# Altium PCB HMC2003_module_SET_RESET.PcbDoc
Units mm, origin at the board's own origin, x right, y up, seen from the top; angles counter-clockwise.
Board outline 56.22 x 22 mm, 2 copper layers (Top Layer, Bottom Layer); 64 components, 30 nets, 154 pads, 77 vias.
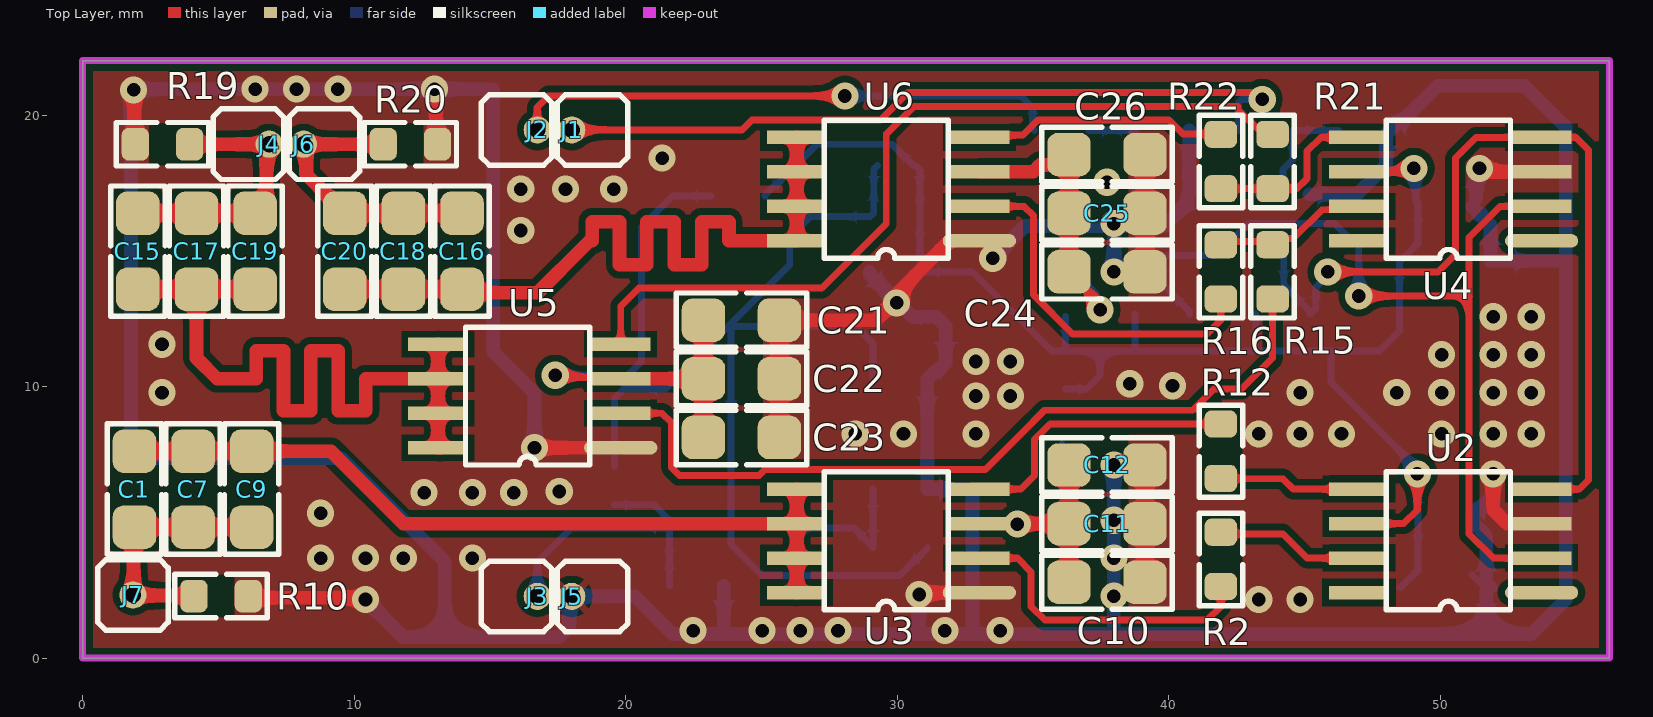
[diagram p0: Top Layer view]
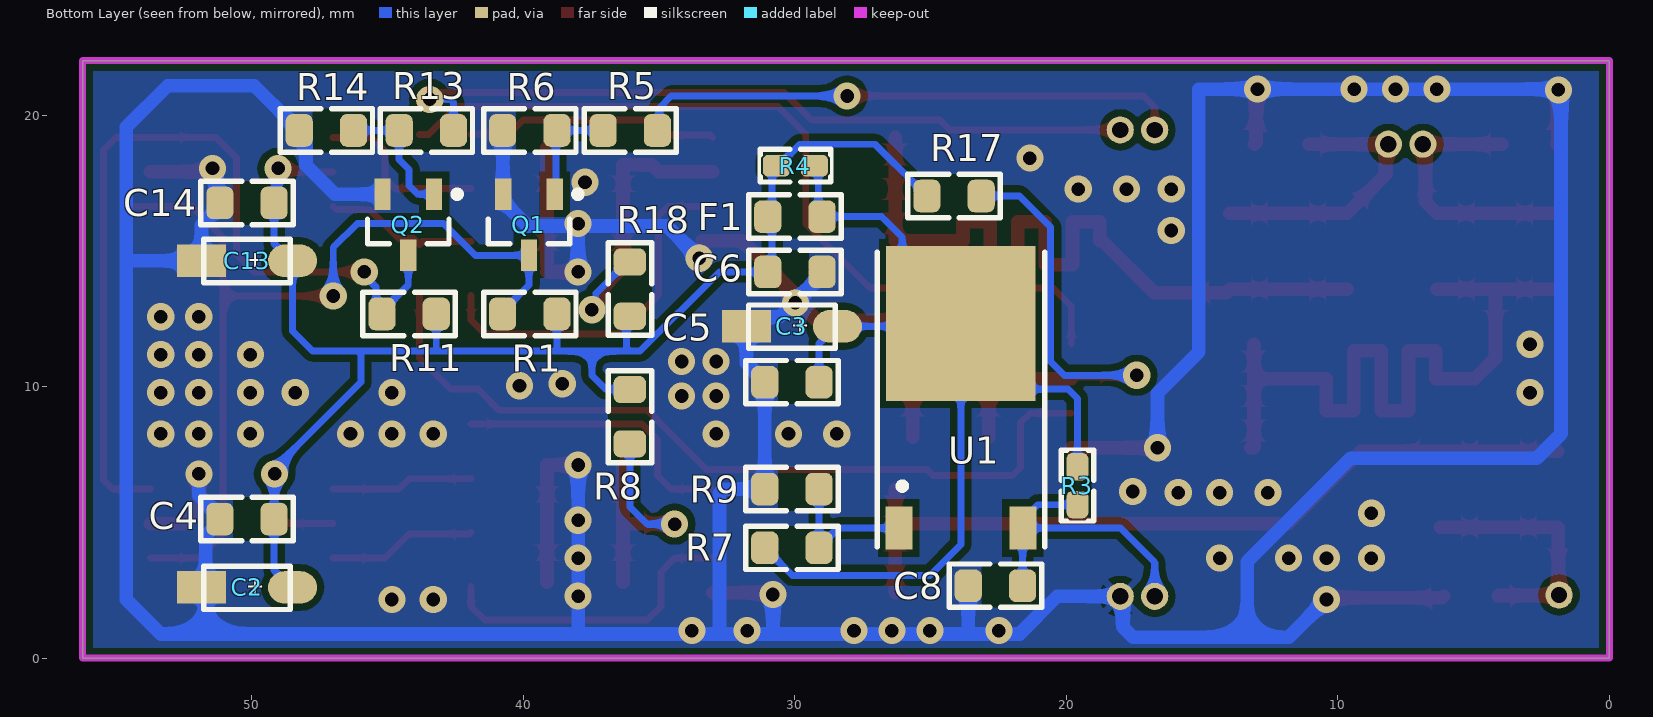
[diagram p1: Bottom Layer view, seen from below]
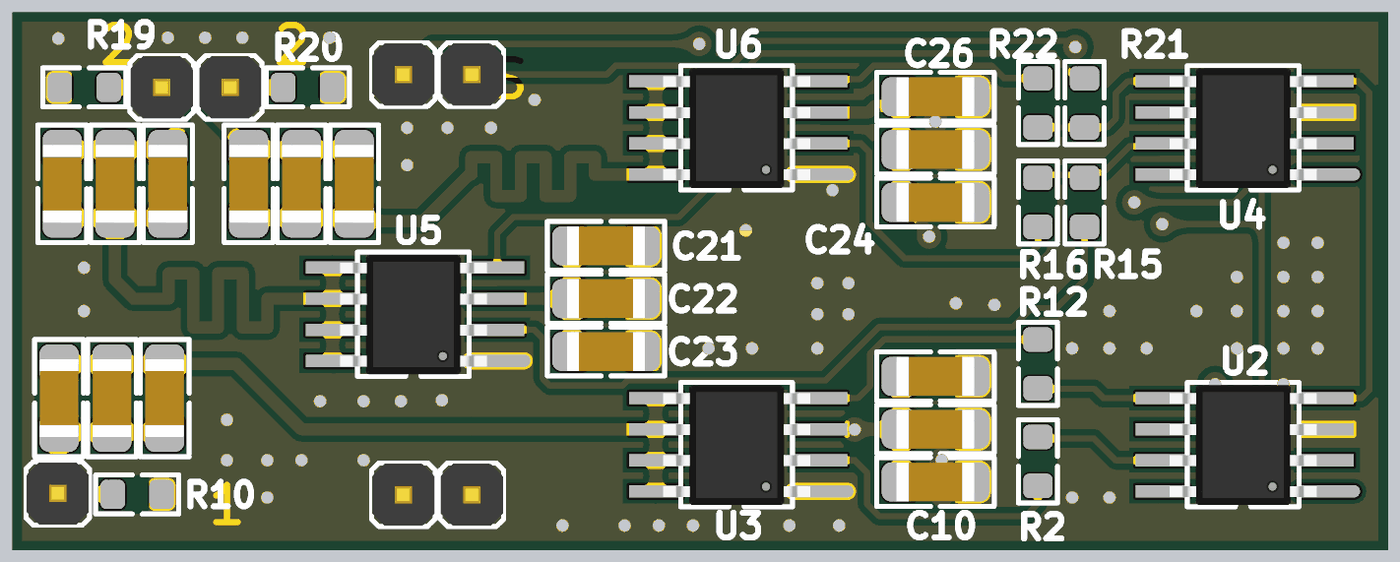
[diagram p2: 3D render of the assembled board from above, using the file's embedded part models]

## Layer stack, top to bottom
Top Solder: solder mask 0.0102, Solder Resist, Dk 3.5
Top Layer: signal copper 0.0356
Dielectric1: dielectric 0.32, FR-4, Dk 4.8
Bottom Layer: signal copper 0.0356
Bottom Solder: solder mask 0.0102, Solder Resist, Dk 3.5

## Board outline
0,0 0,22 56.216,22 56.216,0

## Design rules (kind name [scope] priority, off if disabled: settings)
Clearance [All] p1: gap=0.254 ignorepadtopadclearanceinfootprint=FALSE except(0: Arc-Hole Track-Hole SMDPad-Hole THPad-Hole Via-Hole Fill-Hole Poly-Hole Region-Hole Text-Hole)
PolygonConnect [All] p1: thpad.connectstyle=Relief thpad.reliefconductorwidth=0.254 thpad.reliefentries=4 thpad.polygonreliefangle="45 Angle" thpad.airgapwidth=0.254 smdpad.connectstyle=Direct smdpad.reliefconductorwidth=0.254 smdpad.reliefentries=4 smdpad.polygonreliefangle="90 Angle" smdpad.airgapwidth=0.254 via.connectstyle=Direct via.reliefconductorwidth=0.254 via.reliefentries=4 via.polygonreliefangle="90 Angle" via.airgapwidth=0.254
RoutingVias [All] p1: holewidth=0.5 width=1 viastyle="Through Hole" minholewidth=0.5 minwidth=1 maxholewidth=0.5 maxwidth=1
SilkToSolderMaskClearance SilkscreenOverComponentPads [IsPad] p1: minsilkscreentomaskgap=0.254 clearancetoexposedcopper=TRUE
SolderMaskExpansion [All] p1: expansion=0.102 istentingtop=FALSE
Width [All] p1: maxlimit=0.5 minlimit=0.254 preferedwidth=0.254
29 further rules are at their usual default settings.

## Components (designator, comment, footprint, x,y, rotation, side; value= is the part's Value field where it differs from the comment)
C1 "47nF" C1206 1.905,6.223 r270 top
C2 "4.7uf" cap_smd_a 50.165,2.578 r0 bottom
C3 "4.7uf" cap_smd_a 30.099,12.192 r0 bottom
C4 "100nF" C0805 50.165,5.118 r0 bottom
C5 "100nf" C0805 30.099,10.16 r180 bottom
C6 "100nf" C0805 29.988,14.224 r0 bottom
C7 "47nF" C1206 4.064,6.223 r270 top
C8 "100nf" C0805 22.606,2.667 r180 bottom
C9 "47nF" C1206 6.223,6.223 r270 top
C10 "100nF" C1206 37.719,2.794 r0 top
C11 "100nF" C1206 37.719,4.953 r0 top
C12 "100nF" C1206 37.719,7.112 r0 top
C13 "4.7uf" cap_smd_a 50.165,14.605 r0 bottom
C14 "100nF" C0805 50.165,16.764 r0 bottom
C15 "47nF" C1206 2.032,14.986 r90 top
C16 "47nF" C1206 13.97,14.986 r90 top
C17 "47nF" C1206 4.191,14.986 r90 top
C18 "47nF" C1206 11.811,14.986 r90 top
C19 "47nF" C1206 6.35,14.986 r90 top
C20 "47nF" C1206 9.652,14.986 r90 top
C21 "100nF" C1206 24.257,12.446 r0 top
C22 "100nF" C1206 24.257,10.287 r0 top
C23 "100nF" C1206 24.257,8.128 r0 top
C24 "100nF" C1206 37.719,14.224 r0 top
C25 "100nF" C1206 37.719,16.383 r0 top
C26 "100nF" C1206 37.719,18.542 r0 top
F1 "Ferrite bead" 0805#1 29.988,16.256 r0 bottom value=10mH
J1 "HDRM1" HDR_M_1#1 18.775,19.45 r0 top
J2 "HDRM1" HDR_M_1#2 15.975,19.45 r0 top
J3 "HDRM1" HDR_M_1#2 15.975,2.275 r0 top
J4 "HDRM1" HDR_M_1#2 6.1,18.925 r0 top
J5 "HDRM1" HDR_M_1#1 18.775,2.275 r0 top
J6 "HDRM1" HDR_M_1#1 8.9,18.925 r0 top
J7 "HDRM1" HDR_M_1#3 1.85,2.325 r90 top
Q1 "bc817" sot-23 39.751,16.002 r0 bottom
Q2 "bc817" sot-23 44.196,16.002 r0 bottom
R1 "18K" 0805#1 39.751,12.673 r180 bottom
R2 "100" 0805#1 41.91,3.636 r90 top
R3 "0" 0603 19.558,6.35 r270 bottom
R4 "0" 0603 29.972,18.161 r180 bottom
R5 "1K" 0805#1 36.052,19.431 r0 bottom
R6 "10K" 0805#1 39.751,19.431 r180 bottom
R7 "1.2K" 0805#1 30.099,4.064 r0 bottom
R8 "100" 0805#1 36.068,8.89 r270 bottom
R9 "6.2K" 0805#1 30.099,6.223 r180 bottom
R10 "1.5" 0805#1 5.096,2.286 r0 top
R11 "18K" 0805#2 44.196,12.673 r180 bottom
R12 "100" 0805#1 41.91,7.62 r270 top
R13 "1K" 0805#1 43.561,19.431 r0 bottom
R14 "10K" 0805#1 47.244,19.431 r180 bottom
R15 "100" 0805#1 43.815,14.224 r90 top
R16 "100" 0805#1 41.91,14.224 r90 top
R17 "100" 0805#1 24.13,17.018 r180 bottom
R18 "100" 0805#1 36.068,13.589 r90 bottom
R19 "1.5" 0805#1 2.937,18.923 r180 top
R20 "1.5" 0805#1 12.065,18.923 r0 top
R21 "100" 0805#1 43.815,18.288 r270 top
R22 "100" 0805#1 41.91,18.288 r270 top
U1 "LM1117T-ADJ" DPAK 23.622,8.111 r90 bottom
U2 "TC4428" sop8 50.292,4.191 r180 top
U3 "IRF7105" sop8 29.591,4.191 r180 top
U4 "TC4428" sop8 50.292,17.145 r180 top
U5 "IRF7105" sop8 16.383,9.525 r180 top
U6 "IRF7105" sop8 29.591,17.145 r180 top

## Footprints (in the part's own frame and the unit in brackets; to place one, negate y for a bottom-side part, rotate by r counter-clockwise, add the part's x,y. Pads: shape width x height; smd on the part's side, far side on the other; paste and mask are expansions set on the pad)
0603 [mm]
  rrect50% 1x0.8 smd mask+0.075: 1(-0.7,-0.027) 2(0.7,-0.027)
  silkscreen extent -1.34,-0.63 1.34,0.57, body extent -0.87,-0.5 0.87,0.45, height 0.6
0805#1 [mm] ",0805, 2012, 200X130"
  rrect50% 1x1.2 smd mask+0.075: 1(-1,0) 2(1,0)
  Top Layer pour cut-out: -0.5,0.8 0.5,0.8 0.5,-0.8 -0.5,-0.8
  silkscreen extent -1.7,-0.8 1.7,0.8, body extent -1,-0.65 1,0.65, height 0.8
0805#2 [mm] ",0805, 2012, 200X130"
  rrect50% 1x1.2 smd: 1(-1,0) 2(1,0)
  Top Layer pour cut-out: -0.5,0.8 0.5,0.8 0.5,-0.8 -0.5,-0.8
  silkscreen extent -1.7,-0.8 1.7,0.8, body extent -1,-0.65 1,0.65, height 0.8
C0805 [mm] "CHIP Capacitor, 2.0X1.3mm, 0805"
  rrect50% 1x1.2 smd mask+0.075: 1(-1,0) 2(1,0)
  Top Layer pour cut-out: -0.5,0.8 0.5,0.8 0.5,-0.8 -0.5,-0.8
  silkscreen extent -1.7,-0.8 1.7,0.8, body extent -1,-0.63 1,0.62, height 1
C1206 [mm] "CHIP Capacitor, 3.2X1.6mm, 1206"
  rrect50% 1.6x1.6 smd mask+0.075: 1(-1.4,0) 2(1.4,0)
  Top Layer pour cut-out: -0.8,1 -0.8,-1 0.8,-1 0.8,1
  silkscreen extent -2.4,-1 2.4,1, body extent -1.6,-0.8 1.6,0.8, height 1
cap_smd_a [mm]
  oval 1.8x1.2 smd: 1(-1.676,-0.025)
  rect 1.8x1.2 smd: 2(1.676,-0.025)
  silkscreen extent -1.6,-0.81 1.6,0.79, body extent -1.7,-0.89 1.7,0.91, height 1.7
DPAK [mm]
  rect 1.6x1 smd: 1(-3.319,2.539) 3(-3.319,-2.031)
  rect 5.7x5.5 smd: 2(4.208,0.254)
  silkscreen extent -4.02,-2.83 6.83,3.34, body extent -3.7,-3.05 6.24,3.49, height 2.44
HDR_M_1#1 [mm] "Connector; Header; 1 Position"
  round 1 hole 0.6 mask+0.1: 1(-0.765,0)
  silkscreen extent -1.3,-1.3 1.3,1.3, body extent -1.27,-1.27 1.27,1.27, height 8.54
HDR_M_1#2 [mm] "Connector; Header; 1 Position"
  round 1 hole 0.6 mask+0.1: 1(0.765,0)
  silkscreen extent -1.3,-1.3 1.3,1.3, body extent -1.27,-1.27 1.27,1.27, height 8.54
HDR_M_1#3 [mm] "Connector; Header; 1 Position"
  round 1 hole 0.6 mask+0.1: 1(0,0)
  silkscreen extent -1.3,-1.3 1.3,1.3, body extent -1.27,-1.27 1.27,1.27, height 8.54
sop8 [mm]
  oval 2.7x0.5 smd: 1(-3.429,1.778)
  rect 2.2x0.5 smd: 2(-3.429,0.508) 3(-3.429,-0.762) 4(-3.429,-2.032) 5(3.298,-2.032) 6(3.298,-0.762) 7(3.298,0.508) 8(3.298,1.778)
  silkscreen extent -2.29,-2.67 2.29,2.41, body extent -3.01,-2.56 2.99,2.34, height 1.7
sot-23 [mm]
  rect 0.6x1.15 smd: 1(-0.919,-1.081) 2(0.981,-1.081) 3(0.031,1.169)
  silkscreen extent -1.89,-1.21 1.53,0.74, body extent -1.42,-1.18 1.48,1.12, height 1

## Part data
C1 C4 C5 C6 C7 C8 C9 C10 C11 C12 C14 C15 C16 C17 C18 C19 C20 C21 C22 C23 C24 C25 C26: library part Cap, "Capacitor", LatestRevisionDate=17-Jul-2002, LatestRevisionNote="Re-released for DXP Platform.", PackageDescription="Radial Cap, Thru-Hole; 2 Leads; 0.3 in Pin Spacing", PackageReference=RAD-0.3, Published=8-Jun-2000, Publisher="Altium Limited"
C2 C3 C13: library part "Cap Pol1", "Polarized Capacitor (Radial)", LatestRevisionDate=17-Jul-2002, LatestRevisionNote="Re-released for DXP Platform.", PackageDescription="Polarized Capacitor (Radial); 2 Leads", PackageReference=RB7.6-15, Published=8-Jun-2000, Publisher="Altium Limited"
F1: library part Inductor, "Ferrite bead, 1206", Code_IEC=1005, Code_JEITA=0402, LatestRevisionDate=29-May-2009, LatestRevisionNote="IPC-7351 Footprint Added.", PackageDescription="Chip Inductor", PackageReference=0402-A, Published=8-Jun-2000, Publisher="Altium Limited"
J1 J2 J3 J4 J5 J6 J7: library part HDR_M_1, "CONN, HEADER, Male, pitch: 2.54mm, 1POS"
Q1 Q2: library part 2N3904, "NPN General Purpose Amplifier", ComponentLink1Description="Manufacturer Link", ComponentLink1URL=http://www.fairchildsemi.com/, ComponentLink2Description=Datasheet, ComponentLink2URL=http://www.fairchildsemi.com/ds/2N%2F2N3904.pdf, DatasheetVersion=1997, LatestRevisionDate=15-Jan-2003, LatestRevisionNote="PCB Footprint 'BCY-W3/D4.7' replaced", PackageDescription="TO, Flat Index; 3 In-Line, Axial Leads; Body Dia. 4.5mm; Leads 0.51 x 0.48 mm (max)", PackageReference=TO-92A, PackageVersion=Sep-1998, Published=8-Jun-2000, Publisher="Altium Limited"
R1 R2 R5 R6 R8 R10 R11 R12 R13 R14 R15 R16 R17 R18 R19 R20 R21 R22: library part Res1, "Resistor", LatestRevisionDate=17-Jul-2002, LatestRevisionNote="Re-released for DXP Platform.", PackageDescription="Axial Device, Thru-Hole; 2 Leads; 0.3 in Pin Spacing", PackageReference=AXIAL-0.3, Published=8-Jun-2000, Publisher="Altium Limited"
R3 R4 R7 R9: library part Resistor, "Resistor", Email=razi.vesali@gmail.com, LatestRevisionNote="Re-released for puplic", Published=17-Jun-2016, Publisher="Seyed Razi Vesali"
U1: "800mA Low-Dropout Linear Regulator", DigiKeyPartNumber=LM1117T-ADJ-ND, Manufacturer="National Semiconductor", PackageTopMarking=NSUZXYTTE#*LM1117T*ADJ, PowerWise=N, ComponentLink1Description="LM1117 Datasheet", ComponentLink1URL=http://www.national.com/ds/LM/LM1117.pdf, ComponentLink2Description="LM1117 Web Page", ComponentLink2URL=http://www.national.com/pf/LM/LM1117.html, ComponentLink3Description="T03B Package Page", ComponentLink3URL=http://www.national.com/packaging/folders/t03b.html, CompType="LDO IC", DatasheetVersion=Apr-2006, PackageDescription="TO-220, Molded, 3 Lead, Straight", PackageReference=T03B, PackageVersion="revL, Jan-1992", PartNumber=LM1117T-ADJ, PinCount=3, Published=4-Dec-2008, Publisher="Altium Limited", RoHS=O
U3 U5 U6: library part IRF7106

## Via types
v1: diameter 1, hole 0.5, Top Layer to Bottom Layer, tented both sides, 77 vias

## Nets (pads, with @x,y where several pads share a name; then routed paths per layer and width w, separated by ;. In a path a pad name is that pad's centre, name@x,y a point inside that pad or via, vN(x,y) a via of type N, cw(c..) or ccw(c..) an arc to the next point about the centre after c; other vN are vias at no path point)
8V3: C2.1 C4.1 C6.2 C13.1 C14.1 F1.2 R1.2 R4.1 R8.1 R11.2 R17.1 R18.1 U2.6 U4.6 | length 57.9
  Top Layer w0.254: U2.6 48.641,4.953 49.149,5.461 v1@49.149,6.477 ; U4.6 48.895,17.907 v1(49.022,18.034)
  Bottom Layer w0.254: R17.1 25.13,17.051 25.494,17.415 25.527,17.415 27.035,18.923 29.805,18.923 30.594,18.134 R4.1 30.83,17.976 30.83,16.256 30.83,14.382 C6.2 32.766,14.224 35.687,11.303 36.068,11.303 ; R8.1@36.195,9.906 36.957,9.906 37.465,10.414 37.465,11.303 ; R18.1@36.195,12.573 36.195,11.43 36.068,11.303 ; R1.2 38.751,11.319 38.735,11.303 ; R11.2 43.196,11.319 43.18,11.303 ; C2.1 48.533,2.603 49.165,3.236 C4.1 v1@49.165,6.477 ; v1(49.022,18.034) 49.093,17.963 49.093,16.836 C14.1 49.165,15.263 48.533,14.63 C13.1 48.489,12.04 47.752,11.303 46.101,11.303 ; v1@49.165,6.969 45.974,10.16 45.974,11.176 46.101,11.303 ; 36.068,11.303 36.195,11.303 37.465,11.303 ; 37.465,11.303 38.735,11.303 ; 38.735,11.303 43.18,11.303 ; 43.18,11.303 45.974,11.303 46.101,11.303
  other v1: 49.149,6.786
GNDA: C2.2 C3.2 C4.2 C5.1 C6.1 C8.1 C10.2 C11.2 C12.2 C13.2 C14.2 C21.2 C22.2 C23.2 C24.2 C25.2 C26.2 J5.1 Q1.2 Q2.2 R6.1 R9.1 R10.2 R14.1 R19.2 R20.2 U2.3 U3.1 U4.3 U5.1 U6.1 | length 230.3
  Top Layer w0.254: v1(30.801,2.343) 30.801,2.353 v1@30.861,2.413 ; v1@51.308,18.034 v1@51.435,17.907
  Top Layer w0.5: v1(1.874,20.924) 1.905,20.892 1.905,18.955 R19.2 ; R10.2 6.159,2.222 10.351,2.222 v1(10.414,2.159) ; v1(12.954,20.955) 13.01,20.899 13.01,18.978 R20.2 ; v1(16.637,7.747) U5.1 ; C23.2 C22.2 C21.2 29.202,12.446 29.837,13.081 v1(29.972,13.081) 29.972,13.419 31.92,15.367 U6.1 33.401,15.367 33.401,14.835 v1(33.513,14.723) ; v1@30.861,2.413 U3.1 ; v1(37.973,7.112) C12.2 C11.2 C10.2 ; v1(37.973,14.224) C24.2 ; C24.2@39.119,14.478 C25.2 C26.2 C26.2@39.119,18.796 ; v1@51.435,17.907 U4.3 ; v1(51.935,6.786) 51.935,5.469 52.451,4.953 U2.3
  Bottom Layer w0.254: 23.606,0.905 23.622,0.889 ; 32.766,1.016 32.893,0.889 ; C2.2@51.165,3.076 51.638,2.603 C2.2 C2.2@51.689,2.451 ; C4.2 C4.2@51.165,5.218 ; C14.2@51.165,16.624 C14.2 C14.2@51.3,16.899 ; v1@51.3,17.899 v1(51.435,18.034) ; v1(51.935,6.786) 51.935,6.612 v1@51.943,6.604
  Bottom Layer w0.5: v1(1.874,20.924) 2.227,20.924 2.259,20.955 v1(12.954,20.955) 15.113,20.955 15.113,11.28 16.637,9.756 v1(16.637,7.747) ; v1@1.924,20.682 1.778,20.535 1.778,8.255 2.667,7.366 9.525,7.366 13.335,3.556 13.335,0.762 ; v1(10.414,2.159) 11.811,0.762 13.335,0.762 ; 23.606,0.905 C8.1 ; C6.1 28.988,14.124 30.545,12.567 31.425,12.567 C3.2 31.775,10.867 31.418,10.51 31.349,10.51 31.099,10.26 C5.1 R9.1 32.605,6.223 32.766,6.062 32.766,1.016 ; 30.801,1.076 v1(30.801,2.343) ; v1(33.513,14.723) 34.702,15.912 v1@37.973,15.912 ; v1(37.973,7.112) 37.973,1.016 38.1,0.889 ; v1(37.973,14.224) v1@37.973,15.912 ; R6.1 40.741,19.421 40.741,17.093 40.682,17.033 40.682,16.758 39.836,15.912 v1@37.973,15.912 ; Q2.2 46.928,17.083 47.994,18.149 47.994,19.281 48.494,19.781 48.594,19.781 49.895,21.082 53.086,21.082 54.61,19.558 54.61,14.478 ; C4.2 51.165,5.018 51.689,4.494 51.689,2.756 C2.2 ; C4.2@51.165,5.218 51.943,5.996 v1@51.943,6.604 ; C14.2@51.165,16.624 51.841,15.948 C13.2 54.458,14.63 54.61,14.478 ; C14.2@51.3,16.899 v1@51.3,17.899 ; C2.2@51.689,2.451 51.689,0.889 ; 13.335,0.762 17.526,0.762 17.914,1.15 17.914,2.179 J5.1 20.332,2.275 21.718,0.889 23.622,0.889 32.893,0.889 38.1,0.889 ; 38.1,0.889 51.689,0.889 ; 51.689,0.889 53.34,0.889 54.61,2.159 54.61,14.478
  other v1: 22.479,1.016 25.019,1.016 26.416,1.016 27.813,1.016 31.75,1.016 33.782,1.016 43.307,2.159 44.831,2.159 37.973,2.286 8.763,3.683 10.414,3.683 11.811,3.683 14.351,3.683 37.973,3.683 37.973,5.08 8.763,5.334 12.573,6.096 14.351,6.096 15.875,6.096 17.547,6.135 28.448,8.255 30.226,8.255 32.893,8.255 43.307,8.255 44.831,8.255 46.355,8.255 50.038,8.255 51.943,8.255 53.34,8.255 32.893,9.652 34.163,9.652 2.921,9.779 44.831,9.779 48.387,9.779 50.038,9.779 51.943,9.779 53.34,9.779 40.132,10.033 38.555,10.101 32.893,10.922 34.163,10.922 50.038,11.176 51.943,11.176 53.34,11.176 2.921,11.557 51.943,12.573 53.34,12.573 16.129,15.748 37.973,16.002 16.129,17.272 17.78,17.272 19.558,17.272 37.719,17.526 21.336,18.415 6.35,20.955 7.874,20.955 9.398,20.955
IN_RESET: Q1.3 R1.1 U2.2 U4.2 | length 34.4
  Top Layer w0.254: v1(46.99,13.335) 51.054,13.335 ; U2.2 51.943,3.683 51.054,4.572 51.054,13.335 ; U4.2@54.571,16.637 U4.2 52.197,16.637 51.054,15.494 51.054,13.335
  Bottom Layer w0.254: R1.1 40.751,12.773 39.782,13.742 Q1.3 41.757,14.833 42.926,16.002 46.101,16.002 46.99,15.113 v1(46.99,13.335)
IN_SET: Q2.3 R11.1 U2.4 U4.4 | length 32.3
  Top Layer w0.254: v1(45.847,14.224) 49.911,14.224 50.546,14.859 50.546,18.415 51.308,19.177 U4.4 54.988,19.177 55.452,18.713 55.452,6.557 55.118,6.223 U2.4
  Bottom Layer w0.254: Q2.3 44.227,13.742 45.196,12.773 R11.1 45.404,12.881 45.404,13.654 45.847,14.097 v1(45.847,14.224)
NetC1_1: C1.1 C7.1 C9.1 U3.5 U3.6 U3.7 U3.8 | length 29.3
  Top Layer w0.5: C1.1 C7.1 C9.1 6.226,7.62 9.144,7.62 11.811,4.953 U3.6 ; U3.8 U3.7 U3.6 ; U3.5 U3.6
NetC3_1: C3.1 C5.2 F1.1 R3.1 R4.2 R7.2 U1.2 | length 40.5
  Bottom Layer w0.254: R3.1 19.585,9.552 19.939,9.906 21.463,9.906 U1.2 ; C5.2 29.099,11.585 28.467,12.217 C3.1 23.978,12.217 U1.2 ; R4.2 29.13,17.992 29.13,16.398 F1.1 26.797,16.256 26.035,15.494 26.035,14.478 U1.2 ; R7.2 31.099,4.031 30.735,3.667 30.702,3.667 30.083,3.048 25.019,3.048 23.876,4.191 23.876,12.217 U1.2
NetC10_1: C10.1 C11.1 C12.1 R8.2 U3.3 | length 10.3
  Top Layer w0.5: v1@34.544,4.953 C11.1 ; C10.1 C11.1 ; C12.1 C11.1
  Bottom Layer w0.254: v1(34.417,4.937) 35.433,4.937 36.068,5.572 R8.2
NetC15_1: C15.1 C17.1 C19.1 U5.5 U5.6 U5.7 U5.8 | length 28.9
  Top Layer w0.5: C15.1 C17.1 ; C19.1 C17.1 ; U5.5 U5.6 ; U5.8@13.208,7.747 U5.8 U5.7 U5.6 ; C17.1 4.191,11.049 4.953,10.287 5.207,10.287 6.386,10.287 6.386,11.324 7.394,11.324 7.394,9.104 8.402,9.104 8.402,11.324 9.41,11.324 9.41,9.104 10.418,9.104 10.418,10.287 10.668,10.287 U5.6
NetC16_1: C16.1 C18.1 C20.1 U6.5 U6.6 U6.7 U6.8 | length 28.9
  Top Layer w0.5: C20.1 C18.1 C16.1 14.094,13.462 16.764,13.462 18.51,15.208 18.669,15.367 18.76,15.367 18.76,16.073 19.768,16.073 19.768,14.488 20.776,14.488 20.776,16.073 21.784,16.073 21.784,14.488 22.792,14.488 22.792,16.073 23.8,16.073 23.8,15.367 24.13,15.367 U6.8@26.162,15.367 ; U6.8 U6.7 U6.6 U6.5
NetC21_1: C21.1 C22.1 C23.1 R17.2 U5.3 | length 21.2
  Top Layer w0.254: v1(17.399,10.414) 17.462,10.351 19.748,10.351 U5.3
  Top Layer w0.5: U5.3 C22.1 ; C23.1 C22.1 ; C21.1 C22.1
  Bottom Layer w0.254: v1(17.399,10.414) 20.066,10.414 20.574,10.922 20.574,15.875 21.717,17.018 R17.2
NetC24_1: C24.1 C25.1 C26.1 R18.2 U6.3 | length 11.4
  Top Layer w0.254: C24.1 37.465,13.078 v1(37.465,12.827)
  Top Layer w0.5: U6.3 34.999,17.907 35.253,18.161 36.319,18.161 C25.1 C24.1@36.319,14.478
  Bottom Layer w0.254: R18.2 36.168,14.589 37.322,13.435 37.322,12.97 v1(37.465,12.827)
NetQ1_1: Q1.1 R5.2 R6.2 | length 4.1
  Bottom Layer w0.254: R5.2 R6.2 38.791,19.39 38.791,17.124 Q1.1
NetQ2_1: Q2.1 R13.2 R14.2 | length 4.9
  Bottom Layer w0.254: Q2.1 43.88,17.083 44.196,17.399 44.196,18.001 44.561,18.366 R13.2 R14.2
NetR2_1: R2.1 U3.2 | length 11.5
  Top Layer w0.254: U3.2 34.417,3.683 34.925,3.175 34.925,1.905 35.433,1.397 41.403,1.397 41.91,1.904 R2.1
NetR7_1: R7.1 R9.2 U1.1 | length 5.4
  Bottom Layer w0.254: U1.1 28.404,4.792 R7.1@29.099,4.097 ; R7.1 R7.1@29.099,4.097 ; R9.2 R7.1@29.099,4.097
NetR12_1: R12.1 U3.4 | length 10.7
  Top Layer w0.254: U3.4 34.544,6.223 35.052,6.731 35.052,8.045 35.627,8.62 R12.1
NetR15_1: R15.1 U5.2 | length 30
  Top Layer w0.254: U5.2 21.336,9.017 21.676,8.677 21.676,7.026 21.971,6.731 24.912,6.731 25.128,6.947 33.236,6.947 34.544,8.255 35.417,9.128 40.878,9.128 41.656,9.906 42.672,9.906 43.815,11.049 R15.1@43.815,13.335
NetR16_1: R16.1 U6.2 | length 13.7
  Top Layer w0.254: U6.2 34.671,16.637 35.006,16.302 35.006,13.381 36.449,11.938 41.402,11.938 41.91,12.446 R16.1@41.91,13.351
NetR21_1: R21.1 U5.4 | length 30.9
  Top Layer w0.254: U5.4 19.812,12.954 20.485,13.627 27.216,13.627 29.591,16.002 29.591,19.304 30.607,20.32 42.397,20.32 42.551,20.314 42.551,20.211 43.474,19.288 R21.1
NetR22_1: R22.1 U6.4 | length 9.4
  Top Layer w0.254: U6.4 33.104,19.261 34.624,19.261 35.175,19.812 40.008,19.812 40.516,19.304 41.894,19.304 R22.1
OUT_RESET_1: R2.2 U2.7 | length 5.5
  Top Layer w0.254: R2.2 41.974,4.572 44.196,4.572 45.085,3.683 U2.7
OUT_RESET_2: R15.2 R16.2 U4.7 | length 5.7
  Top Layer w0.254: R16.2@41.918,15.343 43.712,15.343 43.712,15.327 R15.2 44.04,15.449 44.574,15.449 45.634,16.51 45.872,16.51 45.876,16.514 46.871,16.514 U4.7
OUT_SET_1: R12.2 U2.5 | length 5.2
  Top Layer w0.254: R12.2 41.926,6.604 44.196,6.604 44.577,6.223 U2.5
OUT_SET_2: R21.2 R22.2 U4.5 | length 6.5
  Top Layer w0.254: R22.2 R21.2 44.72,17.288 45.085,17.653 45.085,18.669 45.593,19.177 U4.5
RESET: J2.1 R5.1 | length 20.3
  Top Layer w0.254: J2.1 16.74,20.296 17.145,20.701 v1(28.067,20.701)
  Bottom Layer w0.254: v1(28.067,20.701) 34.544,20.701 34.982,20.263 34.982,19.501 R5.1
SET: J1.1 R13.1 | length 28.1
  Top Layer w0.254: J1.1 24.276,19.45 24.638,19.812 29.381,19.812 30.397,20.828 43.18,20.828 v1(43.434,20.574)
  Bottom Layer w0.254: R13.1 42.561,20.463 42.672,20.574 v1(43.434,20.574)
SRX+: C15.2 C17.2 C19.2 J4.1 R19.1 | length 10
  Top Layer w0.5: C15.2 C17.2 C19.2 6.769,16.805 6.769,18.829 J4.1@6.864,18.924 ; R19.1 R19.1 J4.1@6.864,18.924 ; J4.1 J4.1@6.864,18.924
SRY+: C16.2 C18.2 C20.2 J6.1 R20.1 | length 10.4
  Top Layer w0.5: J6.1 J6.1@8.136,18.924 ; R20.1 R20.1 J6.1@8.136,18.924 ; C16.2 C18.2 C20.2 8.231,17.807 8.231,18.829 J6.1@8.136,18.924
SRZ+: C1.2 C7.2 C9.2 J7.1 R10.1 | length 9.1
  Top Layer w0.5: R10.1 4.076,2.305 1.869,2.305 J7.1 1.877,2.352 1.877,4.795 C1.2 C7.2 C9.2
VCC_IN: C8.2 J3.1 R3.2 U1.3 | length 11.3
  Bottom Layer w0.254: J3.1 16.74,3.532 18,4.792 U1.3 ; R3.2 21.033,5.65 21.591,5.092 U1.3 ; C8.2 21.606,4.777 U1.3
pads on no net: U2.1 U2.8 U4.1 U4.8

## Polygon pours and split planes (outlines as drawn)
GNDA on Top Layer "GNDA_L01_P000" (solid, remove dead copper, pour order 0): -0.013,21.983 56.202,21.983 56.202,-0.017 -0.013,-0.017
GNDA on Bottom Layer "GNDA_L02_P001" (solid, remove dead copper, pour order 1): 0,22 56.216,22 56.216,0 0,0

## Keep-outs
Keep-Out Layer:
  the board outline again, w0.254

## Silkscreen, mask and mechanical layers (free items; w line width, h text height)
Top Solder:
  text "2" at 3.429,19.939 h1.52
  text "2" at 10.541,19.939 h1.52
  text "R" at 14.224,18.669 h1.52
  text "S" at 19.431,18.542 h1.52
  text "1" at 7.874,1.143 h1.52

## Text inside footprints (layer, text, board x,y; h text height)
C2: Bottom Overlay "+" at 49.505,2.883 h0.6 r180
C3: Bottom Overlay "+" at 29.439,12.497 h0.6 r180
C13: Bottom Overlay "+" at 49.505,14.91 h0.6 r180